# EAGLE board rc32kram62256ram_v1 (EAGLE 9.6.2)
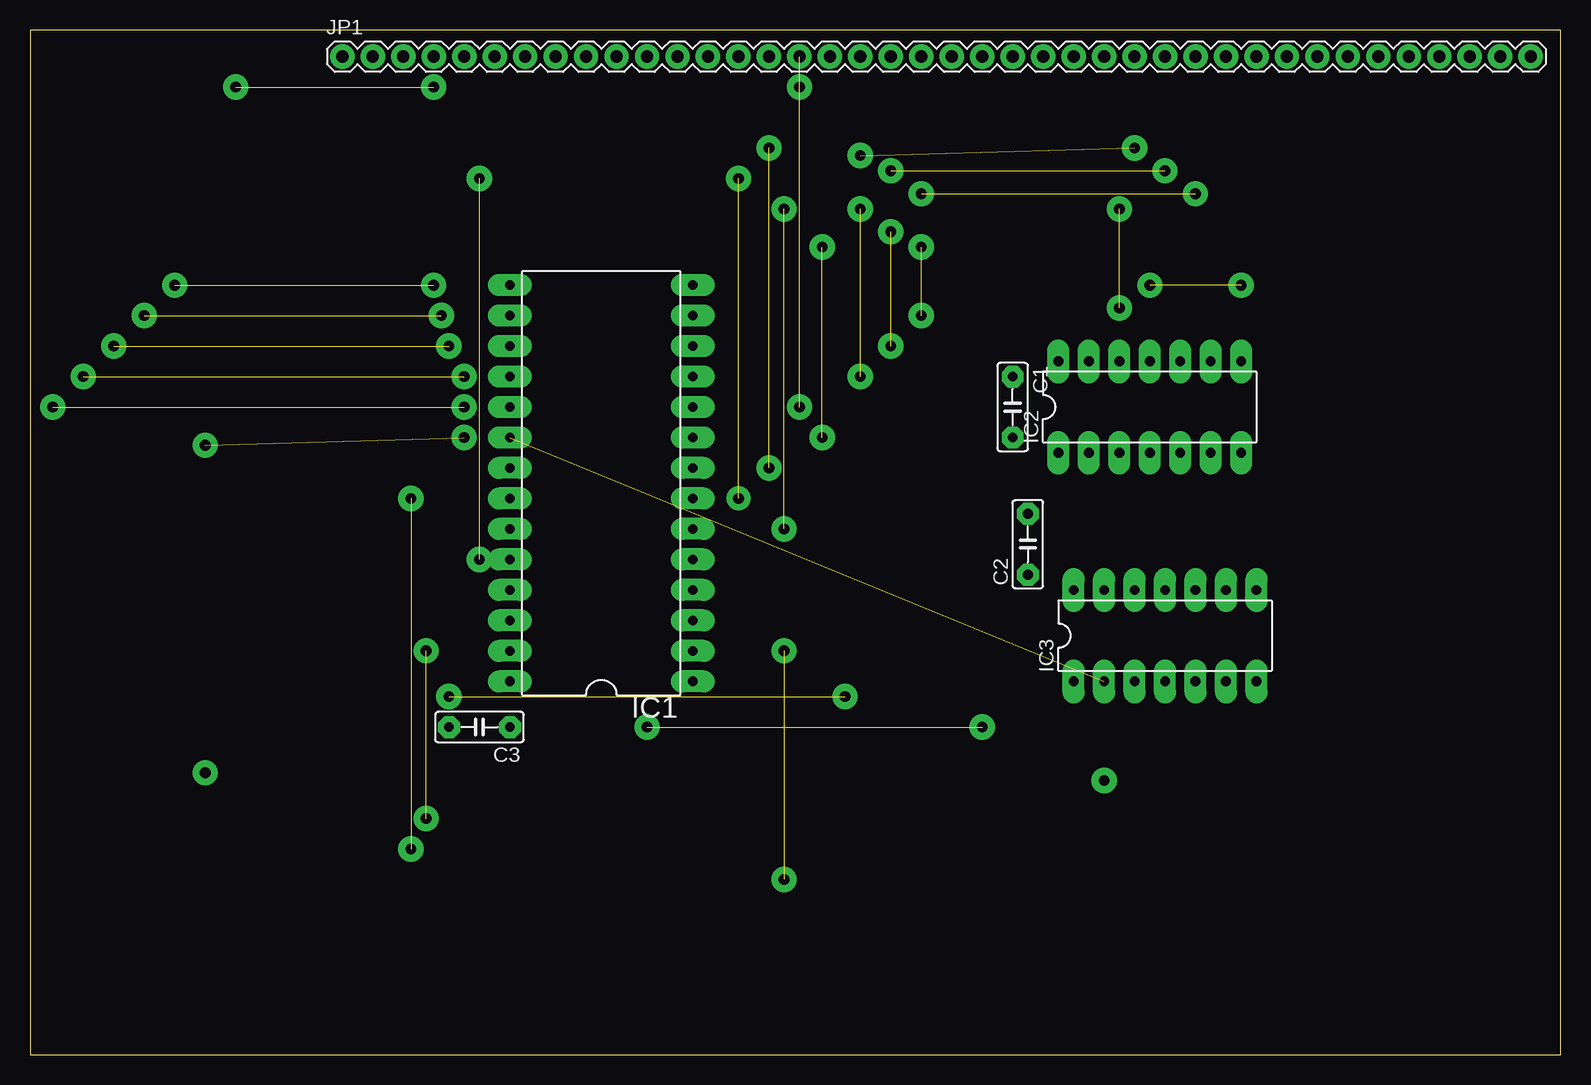
[diagram p0: board, top side]
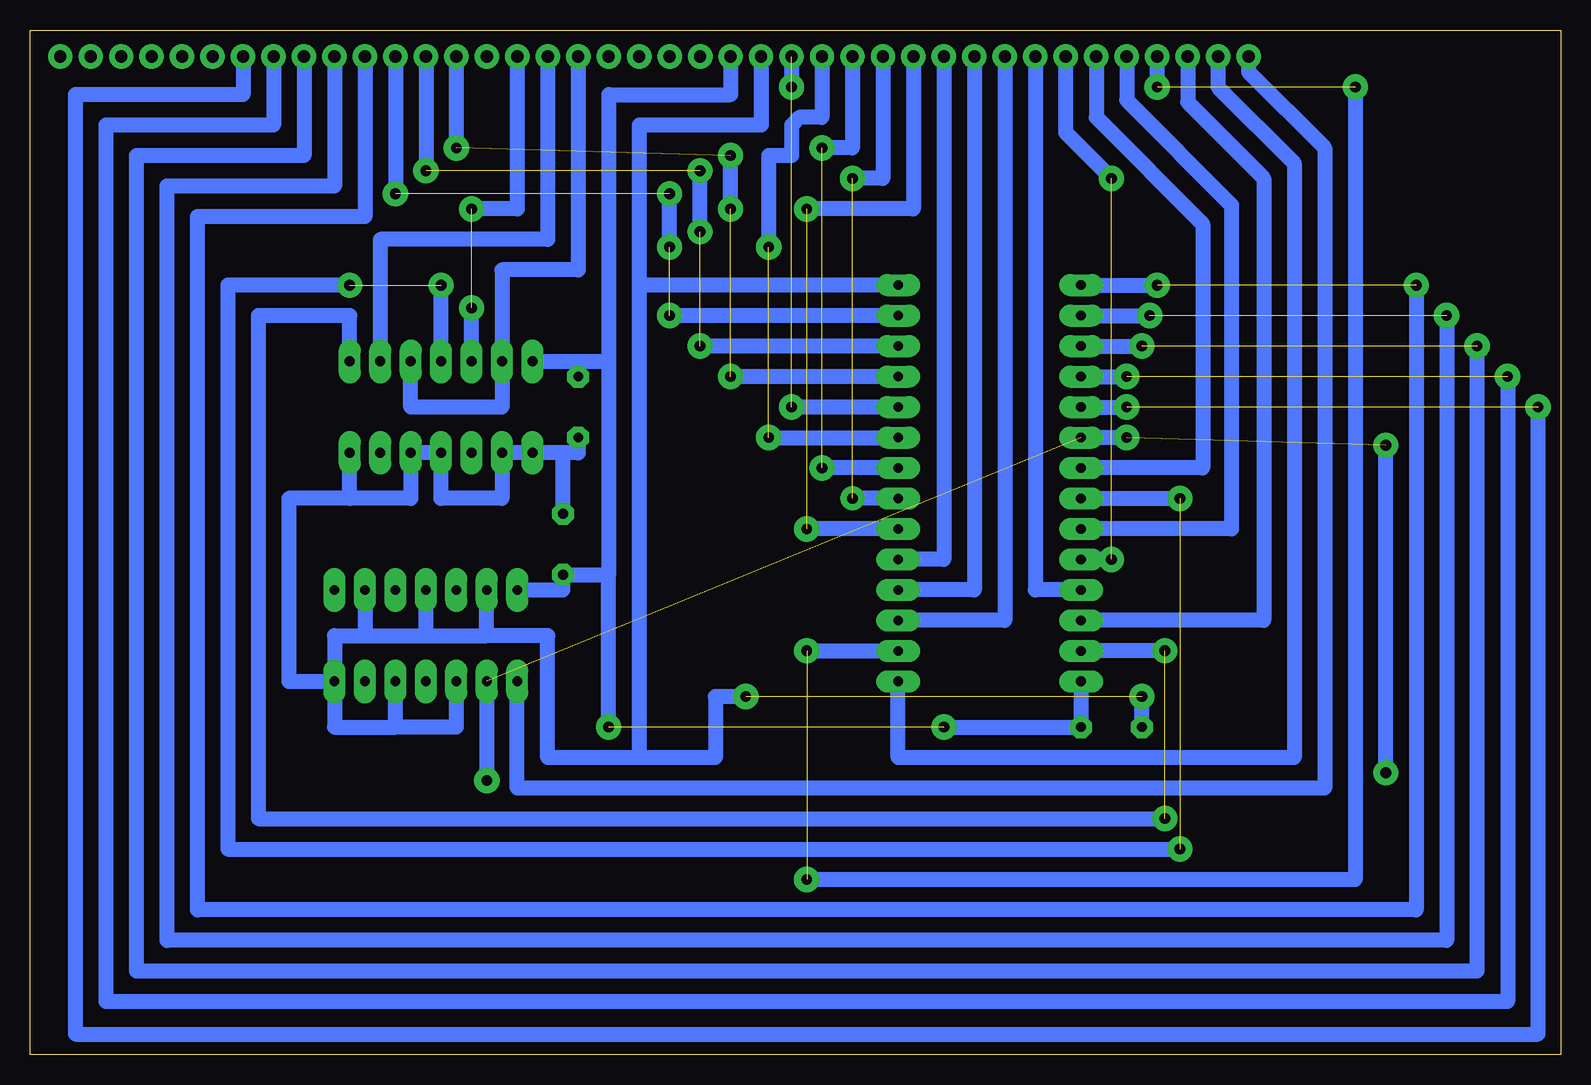
[diagram p1: board, bottom side, seen from below]

Size 127.61 x 85.39 mm. Coordinates in mm from the lower left corner, seen from the top.
Outline: 0,0 127.61,0 127.61,85.39 0,85.39 0,0
Copper layers (1*16): Top 0.035mm / dielectric 1.5mm / Bottom 0.035mm
Design rules "LabE": minimum track width 50mil, minimum drill 0.8mm, track to track 16mil, track to pad 16mil, pad to pad 16mil, via to via 16mil, smd to smd 16mil, copper to edge 0mil, drill to drill 16mil, minimum pad ring 20mil, minimum via ring 20mil, stop-mask expansion 4mil, vias tented up to drill 0mil, thermal gap 10mil

## Footprints (pad centres in the part's own frame; a part is rotated, then mirrored left to right if it is on the bottom)
C050-025X075 = drill 0.813 octagon: 1 -2.54,0; 2 2.54,0
DIL28-6 = drill 0.813 long: 1 -16.51,-7.62; 2 -13.97,-7.62; 3 -11.43,-7.62; 4 -8.89,-7.62; 5 -6.35,-7.62; 6 -3.81,-7.62; 7 -1.27,-7.62; 8 1.27,-7.62; 9 3.81,-7.62; 10 6.35,-7.62; 11 8.89,-7.62; 12 11.43,-7.62; 13 13.97,-7.62; 14 16.51,-7.62; 15 16.51,7.62; 16 13.97,7.62; 17 11.43,7.62; 18 8.89,7.62; 19 6.35,7.62; 20 3.81,7.62; 21 1.27,7.62; 22 -1.27,7.62; 23 -3.81,7.62; 24 -6.35,7.62; 25 -8.89,7.62; 26 -11.43,7.62; 27 -13.97,7.62; 28 -16.51,7.62
DIL14 = drill 0.813 long: 1 -7.62,-3.81; 2 -5.08,-3.81; 3 -2.54,-3.81; 4 0,-3.81; 5 2.54,-3.81; 6 5.08,-3.81; 7 7.62,-3.81; 8 7.62,3.81; 9 5.08,3.81; 10 2.54,3.81; 11 0,3.81; 12 -2.54,3.81; 13 -5.08,3.81; 14 -7.62,3.81
1X40 = drill 1.016: 1 -49.53,0; 2 -46.99,0; 3 -44.45,0; 4 -41.91,0; 5 -39.37,0; 6 -36.83,0; 7 -34.29,0; 8 -31.75,0; 9 -29.21,0; 10 -26.67,0; 11 -24.13,0; 12 -21.59,0; 13 -19.05,0; 14 -16.51,0; 15 -13.97,0; 16 -11.43,0; 17 -8.89,0; 18 -6.35,0; 19 -3.81,0; 20 -1.27,0; 21 1.27,0; 22 3.81,0; 23 6.35,0; 24 8.89,0; 25 11.43,0; 26 13.97,0; 27 16.51,0; 28 19.05,0; 29 21.59,0; 30 24.13,0; 31 26.67,0; 32 29.21,0; 33 31.75,0; 34 34.29,0; 35 36.83,0; 36 39.37,0; 37 41.91,0; 38 44.45,0; 39 46.99,0; 40 49.53,0

## Placement (x,y rotation side)
C1  100n  [C050-025X075]  81.92,53.98 270 top
C2  100n  [C050-025X075]  83.19,42.55 90 top
C3  100n  [C050-025X075]  37.47,27.3 180 top
IC1  [DIL28-6]  47.62,47.62 90 top
IC2  74HCT32N  [DIL14]  93.34,53.98 0 top
IC3  74LS04N  [DIL14]  94.61,34.92 0 top
JP1  [1X40]  75.56,83.19 0 top

## Library data of the parts
C1-C3 = rcl; SPICEPREFIX: C
IC1 = memory-hitachi; OC_FARNELL: unknown; OC_NEWARK: unknown
IC2 IC3 = 74xx-eu
JP1 = pinhead

## Nets
A0: IC1.10 JP1.16
A1: IC1.9 JP1.15
A2: IC1.8 JP1.14
A3: IC1.7 JP1.13
A4: IC1.6 JP1.12
A5: IC1.5 JP1.11
A6: IC1.4 JP1.10
A7: IC1.3 JP1.9
A8: IC1.25 JP1.8
A9: IC1.24 JP1.7
A10: IC1.21 JP1.6
A11: IC1.23 JP1.5
A12: IC1.2 JP1.4
A13: IC1.26 JP1.3
A14: IC1.1 JP1.2
A15: IC3.1 JP1.1
CLK: JP1.21
CS_L: IC1.20 IC3.2
D0: IC1.11 JP1.27
D1: IC1.12 JP1.28
D2: IC1.13 JP1.29
D3: IC1.15 JP1.30
D4: IC1.16 JP1.31
D5: IC1.17 JP1.32
D6: IC1.18 JP1.33
D7: IC1.19 JP1.34
GND: C1.2 C2.2 C3.2 IC1.14 IC2.1 IC2.2 IC2.4 IC2.5 IC2.7 IC3.3 IC3.5 IC3.7 IC3.9 IC3.11 IC3.13 JP1.17
INT_L: JP1.22
IOREQ_L: JP1.26
M1_L: JP1.19
MREQ_L: IC2.10 IC2.13 JP1.23
N$1: JP1.37
N$2: JP1.38
N$3: JP1.39
OE_L: IC1.22 IC2.11
RD_L: IC2.12 JP1.25
RESET_L: JP1.20
RX: JP1.36
TX: JP1.35
VCC: C1.1 C2.1 C3.1 IC1.28 IC2.14 IC3.14 JP1.18
WE_L: IC1.27 IC2.8
WR_L: IC2.9 JP1.24

## Tracks (layer width: path | path; a pad name or v marks a point on that pad's centre or on a via)
A0  (via drill 0.9 pad 2.1)  (3 unrouted)
  Bottom 1.27: IC1.10 v64.14,53.98 | JP1.16 v64.14,80.64
A1  (via drill 0.9 pad 2.1)  (1 unrouted)
  Bottom 1.27: JP1.15 61.59,78.11 63.5,78.11 64.14,77.47 64.14,74.93 66.04,74.93 v66.04,67.31 | v66.04,51.44 IC1.9
A2  (via drill 0.9 pad 2.1)  (1 unrouted)
  Bottom 1.27: JP1.14 59.05,75.56 v61.59,75.56 | IC1.8 v61.59,48.9
A3  (via drill 0.9 pad 2, 0.9 pad 2.1)  (1 unrouted)
  Bottom 1.27: JP1.13 56.52,73.03 v59.05,73.03 | IC1.7 v59.05,46.35
A4  (via drill 0.9 pad 2.1)  (1 unrouted)
  Bottom 1.27: JP1.12 53.98,70.48 v62.87,70.48 | IC1.6 v62.87,43.81
A5
  Bottom 1.27: JP1.11 51.44,41.27 IC1.5
A6
  Bottom 1.27: JP1.10 48.9,38.73 IC1.4
A7
  Bottom 1.27: JP1.9 46.35,36.2 IC1.3
A8
  Bottom 1.27: IC1.25 43.81,38.73 JP1.8
A9  (via drill 0.9 pad 2.1)  (1 unrouted)
  Bottom 1.27: v37.47,41.27 IC1.24 | JP1.7 41.27,76.83 v37.47,73.03
A10
  Bottom 1.27: JP1.6 38.73,78.11 29.84,69.22 29.84,48.9 IC1.21
A11
  Bottom 1.27: IC1.23 27.46,43.81 27.46,70.81 36.2,79.54 JP1.5
A12  (via drill 0.9 pad 2.1)  (2 unrouted)
  Bottom 1.27: v62.87,33.66 IC1.2 | v33.66,80.64 JP1.4 | v17.14,80.64 17.14,14.61 v62.87,14.61
A13
  Bottom 1.27: JP1.3 31.11,79.38 24.77,73.03 24.77,36.2 IC1.26
A14
  Bottom 1.27: JP1.2 28.57,80.64 22.23,74.3 22.23,24.77 55.24,24.77 IC1.1
A15
  Bottom 1.27: JP1.1 26.04,81.92 19.68,75.56 19.68,22.23 87,22.23 IC3.1
CS_L  (via drill 0.9 pad 2.1)  (2 unrouted)
  Bottom 1.27: v36.2,51.44 IC1.20 | IC3.2 v89.53,22.86 | v14.61,23.5 v14.61,50.8
D0  (via drill 0.9 pad 2.1)  (2 unrouted)
  Bottom 1.27: IC1.11 v69.22,56.52 | JP1.27 v92.08,75.56 | v69.22,70.48 v69.22,74.93
D1  (via drill 0.9 pad 2.1)  (2 unrouted)
  Bottom 1.27: IC1.12 v71.75,59.05 | JP1.28 v94.61,73.66 | v71.75,68.58 v71.75,73.66
D2  (via drill 0.9 pad 2.1)  (2 unrouted)
  Bottom 1.27: IC1.13 v74.3,61.59 | JP1.29 v97.16,71.75 | v74.3,67.31 v74.3,71.75
D3  (via drill 0.9 pad 2.1)  (1 unrouted)
  Bottom 1.27: IC1.15 v33.66,64.14 | JP1.30 99.69,69.85 113.67,69.85 113.67,12.06 12.06,12.06 v12.06,64.14
D4  (via drill 0.9 pad 2.1)  (1 unrouted)
  Bottom 1.27: IC1.16 v34.29,61.59 | JP1.31 102.23,72.39 116.2,72.39 116.2,9.53 9.53,9.53 v9.53,61.59
D5  (via drill 0.9 pad 2.1)  (1 unrouted)
  Bottom 1.27: IC1.17 v34.92,59.05 | JP1.32 104.78,74.93 118.75,74.93 118.75,6.99 6.99,6.99 v6.99,59.05
D6  (via drill 0.9 pad 2.1)  (1 unrouted)
  Bottom 1.27: IC1.18 v36.2,56.52 | JP1.33 107.31,77.47 121.28,77.47 121.28,4.45 4.45,4.45 v4.45,56.52
D7  (via drill 0.9 pad 2.1)  (1 unrouted)
  Bottom 1.27: IC1.19 v36.2,53.98 | JP1.34 109.86,80.01 123.83,80.01 123.83,1.72 1.91,1.72 v1.91,53.98
GND  (via drill 0.9 pad 2.1)  (1 unrouted)
  Bottom 1.27: 83.19,50.16 81.92,50.16 C1.2 | 83.19,50.16 IC2.1 IC2.2 88.27,46.35 93.34,46.35 IC2.4 IC2.5 95.89,46.35 100.97,46.35 | 100.97,46.35 IC2.7 | 100.97,46.35 106.05,46.35 106.05,31.11 IC3.7 | IC3.3 92.08,27.3 97.16,27.3 | 97.16,27.3 IC3.5 | 97.16,27.3 102.23,27.3 IC3.7 | IC3.9 99.69,34.92 | 99.69,34.92 102.23,34.92 IC3.7 | 99.69,34.92 94.61,34.92 | 94.61,34.92 IC3.11 | 94.61,34.92 89.53,34.92 | 89.53,34.92 IC3.13 | C2.2 83.19,50.16 | 76.83,24.77 70.48,24.77 70.48,29.84 v67.94,29.84 | 76.83,24.77 84.45,24.77 84.45,34.92 89.53,34.92 | JP1.17 66.67,77.47 76.83,77.47 76.83,64.14 | IC1.14 76.83,64.14 | 76.83,64.14 76.83,24.77 | C3.2 v34.92,29.84
MREQ_L
  Bottom 1.27: IC2.10 95.89,53.98 88.27,53.98 IC2.13 88.27,65.41 81.92,65.41 JP1.23
OE_L  (via drill 0.9 pad 2.1)  (2 unrouted)
  Bottom 1.27: IC2.11 v93.34,64.14 | v31.75,17.14 111.12,17.14 111.12,64.14 v100.97,64.14 | IC1.22 v31.75,46.35
RD_L  (via drill 0.9 pad 2.1)  (1 unrouted)
  Bottom 1.27: IC2.12 v90.81,62.23 | v90.81,70.48 87,70.48 JP1.25
VCC  (via drill 0.9 pad 2.1)  (1 unrouted)
  Bottom 1.27: 79.38,57.78 79.38,80.01 69.22,80.01 JP1.18 | 79.38,57.78 79.38,40.01 | IC2.14 81.92,57.78 | 81.92,57.78 79.38,57.78 | C1.1 81.92,57.78 | IC1.28 C3.1 v51.44,27.3 | IC3.14 83.19,38.73 C2.1 79.38,40.01 | v79.38,27.3 79.38,40.01
WE_L  (via drill 0.9 pad 2.1)  (1 unrouted)
  Bottom 1.27: IC2.8 100.97,61.59 108.58,61.59 108.58,19.68 v33.02,19.68 | v33.02,33.66 IC1.27
WR_L
  Bottom 1.27: IC2.9 98.42,67.94 84.45,67.94 JP1.24